# EAGLE board Power Board to eagle autodesk2 (EAGLE 9.2.2)

Size 100 x 80 mm. Coordinates in mm from the lower left corner, seen from the top.
Outline: 0,0 100,0 100,80 0,80 0,0
Copper layers (1*16): Top 0.035mm / dielectric 1.5mm / Bottom 0.035mm
Design rules "default": minimum track width 6mil, minimum drill 0.35mm, track to track 6mil, track to pad 6mil, pad to pad 6mil, via to via 6mil, smd to smd 6mil, copper to edge 40mil, drill to drill 6mil, minimum pad ring 10mil, minimum via ring 8mil, stop-mask expansion 4mil, vias tented up to drill 0mil, thermal gap 10mil

## Footprints (pad centres in the part's own frame; a part is rotated, then mirrored left to right if it is on the bottom)
CAP_1210 = smd 1.6 x 2.7: 1 -1.4,0; 2 1.4,0
CAP_0603 = smd 1.1 x 1: 1 -0.85,0; 2 0.85,0
CAP_0805 = smd 1.3 x 1.5: 1 -0.95,0; 2 0.95,0
CAP_1206 = smd 1.6 x 1.8: 1 -1.4,0; 2 1.4,0
S1A/B_GEN_PURP_DIODE = smd 3 x 2.2: 1 0,0; 2 4,0
BLUE_LED_0805 = smd 1.1 x 1.25: 1 0,0; 2 2.5,0
DIO_0805 = smd 1.3 x 1.5: 1 -0.95,0; 2 0.95,0
BLADE_FUSE_CLIP = drill 1.64 pad 2.5: 1 -5.715,0; 2 -2.055,0; 3 2.415,0; 4 6.075,0
2X5_HEADER_SHROUDED = drill 1.2 pad 2 square: 1 -5.08,-1.27 | drill 1.2 pad 2: 2 -5.08,1.27; 3 -2.54,-1.27; 4 -2.54,1.27; 5 0,-1.27; 6 0,1.27; 7 2.54,-1.27; 8 2.54,1.27; 9 5.08,-1.27; 10 5.08,1.27
2X7_HEADER_SHROUDED = drill 1.2 pad 2 square: 1 -7.62,-1.27 | drill 1.2 pad 2: 2 -7.62,1.27; 3 -5.08,-1.27; 4 -5.08,1.27; 5 -2.54,-1.27; 6 -2.54,1.27; 7 0,-1.27; 8 0,1.27; 9 2.54,-1.27; 10 2.54,1.27; 11 5.08,-1.27; 12 5.08,1.27; 13 7.62,-1.27; 14 7.62,1.27
G5LE = drill 1.45 pad 2.2: 1 -5.969,5.08; 2 5.969,5.08; O 5.969,-7.112; P 0,7.112; S -5.969,-7.112
IND._6X6X2.8MM = smd 1.6 x 5.7: 1 -2.35,0; 2 2.35,0
RES_0805 = smd 1.3 x 1.5: 1 -0.95,0; 2 0.95,0
TRANS_PREBIAS_NPN_SOT23-3 = smd 1 x 1.1: 1 0.95,2; 2 -0.95,2; 3 0,0
LM53603-Q1 = smd 0.3 x 1.05: 1 -2.275,-2.925; 2 -1.625,-2.925; 3 -0.975,-2.925; 4 -0.325,-2.925; 5 0.325,-2.925; 6 0.975,-2.925; 7 1.625,-2.925; 8 2.275,-2.925; 9 2.275,2.925; 10 1.625,2.925; 11 0.975,2.925; 12 0.325,2.925; 13 -0.325,2.925; 14 -0.975,2.925; 15 -1.625,2.925; 16 -2.275,2.925 | smd 4 x 3: 17 0,0
MOLEX_6-PIN_PWR = drill 1.8 pad 3.5: 1 0,0; 2 -4.2,0; 3 -8.4,0; 4 0,5.5; 5 -4.2,5.5; 6 -8.4,5.5 | hole 3: 0,-7.3; -8.4,-7.3
DC_POWER_JACK = drill 1 pad 3 square: 1 0.5,4.5 | drill 1 pad 3: 2 6.5,4.5; 3 3.5,9.2
0.250"_MALE_QUICK_CONN = drill 1.448 pad 2.54: 1 -2.54,0; 2 2.54,0

## Placement (x,y rotation side)
C1  10uF  [CAP_1210]  -58.42,57.15 0 top  (outside the outline)
C2  10uF  [CAP_1210]  -15.24,62.23 0 top  (outside the outline)
C3  10uF  [CAP_1210]  -20.32,62.23 0 top  (outside the outline)
C4  10nF  [CAP_0603]  -52.07,64.77 0 top  (outside the outline)
C5  4.7uF  [CAP_0805]  -20.32,64.77 0 top  (outside the outline)
C6  1uF  [CAP_0603]  -55.88,64.77 0 top  (outside the outline)
C7  0.47uF  [CAP_0603]  -59.69,64.77 0 top  (outside the outline)
C8  22uF  [CAP_1206]  -43.18,62.23 0 top  (outside the outline)
C9  22uF  [CAP_1206]  -48.26,62.23 0 top  (outside the outline)
C10  22uF  [CAP_1206]  -53.34,62.23 0 top  (outside the outline)
D1  S1A/B_GEN_PURP_DIODE  [S1A/B_GEN_PURP_DIODE]  -29.21,62.23 0 top  (outside the outline)
D2  S1A/B_GEN_PURP_DIODE  [S1A/B_GEN_PURP_DIODE]  -38.1,62.23 0 top  (outside the outline)
D3  Blue  [BLUE_LED_0805]  -59.69,62.23 0 top  (outside the outline)
D4  Blue  [BLUE_LED_0805]  -16.51,64.77 0 top  (outside the outline)
D5  DIODE_0805  [DIO_0805]  -25.4,64.77 0 top  (outside the outline)
D6  DIODE_0805  [DIO_0805]  -29.21,64.77 0 top  (outside the outline)
F1  BLADE_FUSE_CLIP  [BLADE_FUSE_CLIP]  -21.59,58.42 0 top  (outside the outline)
J1  PBOARD  [2X5_HEADER_SHROUDED]  -54.61,29.21 0 top  (outside the outline)
J2  HUB  [2X7_HEADER_SHROUDED]  -27.94,50.8 0 top  (outside the outline)
K1  G5LE  [G5LE]  -21.59,13.97 0 top  (outside the outline)
K2  G5LE_4  [G5LE]  -39.37,13.97 0 top  (outside the outline)
L1  2.2uH  [IND._6X6X2.8MM]  -52.07,49.53 0 top  (outside the outline)
R1  3  [RES_0805]  -33.02,64.77 0 top  (outside the outline)
R2  1K  [RES_0805]  -36.83,64.77 0 top  (outside the outline)
R3  1K  [RES_0805]  -40.64,64.77 0 top  (outside the outline)
R4  1K  [RES_0805]  -44.45,64.77 0 top  (outside the outline)
R5  1K  [RES_0805]  -48.26,64.77 0 top  (outside the outline)
T1  TRANS_PREBIAS_NPN_SOT23-3  [TRANS_PREBIAS_NPN_SOT23-3]  -31.75,57.15 0 top  (outside the outline)
T2  TRANS_PREBIAS_NPN_SOT23-3  [TRANS_PREBIAS_NPN_SOT23-3]  -35.56,57.15 0 top  (outside the outline)
U1  LM53603-Q1  [LM53603-Q1]  -45.72,49.53 0 top  (outside the outline)
U2  MOLEX_6-PIN_PWR  [MOLEX_6-PIN_PWR]  -50.8,13.97 0 top  (outside the outline)
U3  DC_POWER_JACK  [DC_POWER_JACK]  -43.18,25.4 0 top  (outside the outline)
U4  MOLEX_6-PIN_PWR  [MOLEX_6-PIN_PWR]  -16.51,38.1 0 top  (outside the outline)
U5  0.250''_MALE_QUICK_CONN  [0.250"_MALE_QUICK_CONN]  -41.91,58.42 0 top  (outside the outline)
U6  0.250''_MALE_QUICK_CONN  [0.250"_MALE_QUICK_CONN]  -50.8,58.42 0 top  (outside the outline)

## Library data of the parts
C1-C10 D5 D6 K1 K2 R1-R5 = common
D1 D2 = common; DATASHEET: http://www.diodes.com/_files/datasheets/ds16003.pdf; MANUFACTURER: Diodes Incorporated
D3 D4 = common; DATASHEET: http://optoelectronics.liteon.com/upload/download/DS22-2000-233/S_110_LTST-C171TBKT(0630).pdf; MANUFACTURER: Lite-On Inc
F1 = common; DATASHEET: http://www.memoryprotectiondevices.com/datasheets/BK-6011-datasheet.pdf; MANUFACTURER: MPD
J1 = common; DATASHEET: http://www.on-shore.com/wp-content/uploads/2015/09/302-sxxx.pdf; MANUFACTURER: OST On Shore Technology
J2 = common; DATASHEET: http://sullinscorp.com/catalogs/145_PAGE118_.100_SBH11_SERIES_MALE_BOX_HDR_ST_RA_SMT.pdf
L1 = common; DATASHEET: http://www.yuden.co.jp/productdata/catalog/en/wound04_e.pdf; MANUFACTURER: Taiyo Yuden
T1 T2 = common; DATASHEET: http://www.onsemi.com/pub_link/Collateral/DTC114E-D.PDF; MANUFACTURER: ON Semiconductor
U1 = common; DATASHEET: http://www.ti.com/lit/ds/symlink/lm53602-q1.pdf; MANUFACTURER: Texas Instruments
U2 U4 = common; DATASHEET: http://www.molex.com/pdm_docs/sd/039301062_sd.pdf; MANUFACTURER: Molex
U3 = common; DATASHEET: http://www.cui.com/product/resource/pj-002a.pdf; MANUFACTURER: CUI Inc.
U5 U6 = common; MANUFACTURER: TE Connectivity

## Nets
5V: C8.1 C9.1 C10.1 J2.2 L1.2 R1.2 U1.9
12V: C1.1 C2.1 C3.1 C4.1 D1.2 D2.2 K1.1 K1.P K2.1 K2.P R2.2 R3.2 U1.11 U1.12 U1.13 U6.1 U6.2
ERASE: J1.6 J2.11
GND: C1.2 C2.2 C3.2 C4.2 C5.2 C6.2 C8.2 C9.2 C10.2 J1.1 J2.1 J2.6 R4.1 R5.1 T1.2 T2.2 U1.6 U1.7 U1.10 U1.15 U1.16 U1.17 U2.4 U2.5 U2.6 U3.2 U3.3 U4.4 U4.5 U4.6
NET_0: F1.1 F1.2 U5.1 U5.2
NET_3: C5.1 U1.4
NET_4: C6.1 R1.1 U1.5
NET_5: C7.1 U1.3
NET_6: C7.2 L1.1 U1.1 U1.2
NET_8: F1.3 F1.4 U2.1 U2.2 U2.3 U3.1
NET_11: D3.1 R2.1
NET_12: D4.1 R3.1
NET_13: D1.1 D3.2 K1.2 T1.3
NET_14: D2.1 D4.2 K2.2 T2.3
NET_21: D6.1 R5.2 T2.1
NET_22: D5.1 R4.2 T1.1
NET_23: D5.2 D6.2 J2.5
RESET: J1.4 J2.13
SWITCHED_12V: K1.S K2.S U4.1 U4.2 U4.3
UART_CTS: J1.3 J2.8
UART_RTS: J1.10 J2.10
UART_RX: J1.9 J2.14
UART_TX: J1.7 J2.12

## Tracks (layer width: path | path; a pad name or v marks a point on that pad's centre or on a via)
5V  (6 unrouted)
12V  (16 unrouted)
ERASE  (1 unrouted)
GND  (29 unrouted)
NET_0  (3 unrouted)
NET_3  (1 unrouted)
NET_4  (2 unrouted)
NET_5  (1 unrouted)
NET_6  (3 unrouted)
NET_8  (5 unrouted)
NET_11  (1 unrouted)
NET_12  (1 unrouted)
NET_13  (3 unrouted)
NET_14  (3 unrouted)
NET_21  (2 unrouted)
NET_22  (2 unrouted)
NET_23  (2 unrouted)
RESET  (1 unrouted)
SWITCHED_12V  (4 unrouted)
UART_CTS  (1 unrouted)
UART_RTS  (1 unrouted)
UART_RX  (1 unrouted)
UART_TX  (1 unrouted)